# EAGLE board schematic (EAGLE 5.07)

Size 100 x 80 mm. Coordinates in mm from the lower left corner, seen from the top.
Outline: 0,0 100,0 100,80 0,80 0,0
Copper layers (1*16): Top 0.035mm / dielectric 1.5mm / Bottom 0.035mm
Design rules "default": minimum track width 10mil, minimum drill 24mil, track to track 8mil, track to pad 8mil, pad to pad 8mil, via to via 8mil, smd to smd 8mil, copper to edge 40mil, drill to drill 8mil, minimum pad ring 10mil, minimum via ring 8mil, stop-mask expansion 4mil, vias tented up to drill 0mil, thermal gap 10mil

## Footprints (pad centres in the part's own frame; a part is rotated, then mirrored left to right if it is on the bottom)
1X06 = drill 1.016 round: 1 0,0; 2 2.54,0; 3 5.08,0; 4 7.62,0; 5 10.16,0; 6 12.7,0
C2.5-3 = drill 0.813 pad 1.6 octagon: 1 -1.27,0; 2 1.27,0
CAP-PTH-SMALL = drill 0.7 round: 1 0,0; 2 2.54,0
78XXL = drill 1.016 long: GND 0,-3.81; IN -2.54,-3.81; OUT 2.54,-3.81 | hole 3.302: 0,11.176
SSOP28DB = smd 0.348 x 1.397: 1 -4.225,-3.656; 2 -3.575,-3.656; 3 -2.925,-3.656; 4 -2.275,-3.656; 5 -1.625,-3.656; 6 -0.975,-3.656; 7 -0.325,-3.656; 8 0.325,-3.656; 9 0.975,-3.656; 10 1.625,-3.656; 11 2.275,-3.656; 12 2.925,-3.656; 13 3.575,-3.656; 14 4.225,-3.656; 15 4.225,3.656; 16 3.575,3.656; 17 2.925,3.656; 18 2.275,3.656; 19 1.625,3.656; 20 0.975,3.656; 21 0.325,3.656; 22 -0.325,3.656; 23 -0.975,3.656; 24 -1.625,3.656; 25 -2.275,3.656; 26 -2.925,3.656; 27 -3.575,3.656; 28 -4.225,3.656
DIL28-3 = drill 0.813 long: 1 -16.51,-3.81; 2 -13.97,-3.81; 3 -11.43,-3.81; 4 -8.89,-3.81; 5 -6.35,-3.81; 6 -3.81,-3.81; 7 -1.27,-3.81; 8 1.27,-3.81; 9 3.81,-3.81; 10 6.35,-3.81; 11 8.89,-3.81; 12 11.43,-3.81; 13 13.97,-3.81; 14 16.51,-3.81; 15 16.51,3.81; 16 13.97,3.81; 17 11.43,3.81; 18 8.89,3.81; 19 6.35,3.81; 20 3.81,3.81; 21 1.27,3.81; 22 -1.27,3.81; 23 -3.81,3.81; 24 -6.35,3.81; 25 -8.89,3.81; 26 -11.43,3.81; 27 -13.97,3.81; 28 -16.51,3.81
HC49U-V = drill 0.813 round: 1 -2.413,0; 2 2.413,0
AXIAL-0.3 = drill 0.9 round: P$1 -3.81,0; P$2 3.81,0
SWITCH-SPST = drill 1.016 round: 1 0,2.54; 2 0,0; 3 0,-2.54
1X01 = drill 1.016 round: 1 0,0
DB9 = drill 1.016 octagon: 1 -5.486,-1.27; 2 -2.743,-1.27; 3 0,-1.27; 4 2.743,-1.27; 5 5.486,-1.27; 6 -4.115,1.27; 7 -1.372,1.27; 8 1.372,1.27; 9 4.115,1.27 | drill 3.302 pad 5.08 round: G1 -12.522,0; G2 12.522,0
USB-A-H = drill 0.914 round: D+ 2.4,1; D- 2.4,-1; GND 2.4,3.5; VBUS 2.4,-3.5 | drill 2.2 round: GND@1 0,5.8; GND@2 0,-5.8 | hole 1.1: -0.1,2.25; -0.1,-2.25

## Placement (x,y rotation side)
BLUETOOTH  [1X06]  -43.18,66.04 0 top  (outside the outline)
C1  1uF  [C2.5-3]  -63.5,58.42 0 top  (outside the outline)
C2  0.1uF  [C2.5-3]  -33.02,58.42 0 top  (outside the outline)
C3  0.1uF  [C2.5-3]  -39.37,58.42 0 top  (outside the outline)
C4  0.1uF  [C2.5-3]  -45.72,58.42 0 top  (outside the outline)
C5  22pF  [C2.5-3]  -52.07,58.42 0 top  (outside the outline)
C6  22pF  [C2.5-3]  -58.42,58.42 0 top  (outside the outline)
C7  473pF  [CAP-PTH-SMALL]  -57.15,72.39 0 top  (outside the outline)
C8  473pF  [CAP-PTH-SMALL]  -62.23,72.39 0 top  (outside the outline)
C9  473pF  [CAP-PTH-SMALL]  -16.51,74.93 0 top  (outside the outline)
C10  473pF  [CAP-PTH-SMALL]  -21.59,74.93 0 top  (outside the outline)
C11  473pF  [CAP-PTH-SMALL]  -26.67,74.93 0 top  (outside the outline)
IC1  78L05  [78XXL]  -50.8,6.35 0 top  (outside the outline)
IC2  FT232RL  [SSOP28DB]  -59.69,46.99 0 top  (outside the outline)
IC4  AVR-MEGA8-P  [DIL28-3]  -31.75,48.26 0 top  (outside the outline)
Q1  16MHz  [HC49U-V]  -62.23,-5.08 0 top  (outside the outline)
R1  1K  [AXIAL-0.3]  -15.24,67.31 0 top  (outside the outline)
R2  1K  [AXIAL-0.3]  -20.32,67.31 0 top  (outside the outline)
R3  [AXIAL-0.3]  -48.26,66.04 0 top  (outside the outline)
R4  100  [AXIAL-0.3]  -25.4,67.31 0 top  (outside the outline)
R5  1K  [AXIAL-0.3]  -55.88,66.04 0 top  (outside the outline)
R6  1K  [AXIAL-0.3]  -17.78,72.39 0 top  (outside the outline)
R7  1K  [AXIAL-0.3]  -27.94,72.39 0 top  (outside the outline)
R8  1K  [AXIAL-0.3]  -38.1,72.39 0 top  (outside the outline)
R9  1K  [AXIAL-0.3]  -48.26,72.39 0 top  (outside the outline)
S1  [SWITCH-SPST]  -58.42,6.35 0 top  (outside the outline)
U$1  M01PTH  [1X01]  -26.67,58.42 0 top  (outside the outline)
X1  [DB9]  -29.21,7.62 0 top  (outside the outline)
X3  USB-A-H  [USB-A-H]  -20.32,34.29 0 top  (outside the outline)

## Library data of the parts
BLUETOOTH C7-C11 IC1 IC2 IC4 Q1 R1-R9 S1 U$1 X1 X3 = SparkFun-3-2-07
C1-C6 = capacitor-wima

## Nets
+5V: BLUETOOTH.2 C1.1 C3.1 IC1.IN IC2.19 IC2.20 IC4.7 R3.P$2 S1.2
N$1: IC2.15 X3.GND
N$2: IC2.16 X3.D+
N$3: S1.3 X3.D-
N$4: C2.1 IC1.OUT S1.1
N$5: C1.2 C2.2 IC1.GND
N$6: IC2.1 R1.P$2
N$7: BLUETOOTH.4 IC4.2 R1.P$1
N$8: IC2.5 R2.P$2
N$9: BLUETOOTH.5 IC4.3 R2.P$1
N$10: IC2.3 R4.P$1
N$11: C4.2 IC2.2
N$12: C4.1 IC4.1 R3.P$1 R4.P$2
N$13: C7.1 R5.P$2
N$14: C5.1 IC4.9 Q1.1
N$15: C6.1 IC4.10 Q1.2
N$16: C7.2 IC4.14 R5.P$1
N$17: C8.1 R6.P$2
N$18: C8.2 IC4.15 R6.P$1
N$19: C9.1 R7.P$2
N$20: C9.2 IC4.16 R7.P$1
N$21: C10.1 R8.P$2
N$22: C10.2 IC4.17 R8.P$1
N$23: C11.1 IC4.18 R9.P$2
N$24: C11.2 R9.P$1 U$1.1
PE: BLUETOOTH.3 C3.2 C5.2 C6.2 IC2.7 IC2.18 IC2.21 IC2.25 IC2.26 IC4.8 X3.VBUS
VCCIO: IC2.4

## Tracks (layer width: path | path; a pad name or v marks a point on that pad's centre or on a via)
+5V  (8 unrouted)
N$1  (1 unrouted)
N$2  (1 unrouted)
N$3  (1 unrouted)
N$4  (2 unrouted)
N$5  (2 unrouted)
N$6  (1 unrouted)
N$7  (2 unrouted)
N$8  (1 unrouted)
N$9  (2 unrouted)
N$10  (1 unrouted)
N$11  (1 unrouted)
N$12  (3 unrouted)
N$13  (1 unrouted)
N$14  (2 unrouted)
N$15  (2 unrouted)
N$16  (2 unrouted)
N$17  (1 unrouted)
N$18  (2 unrouted)
N$19  (1 unrouted)
N$20  (2 unrouted)
N$21  (1 unrouted)
N$22  (2 unrouted)
N$23  (2 unrouted)
N$24  (2 unrouted)
PE  (10 unrouted)